# Altium PCB PCB2_relay_8k.PcbDoc
Units mil, origin at the board's own origin, x right, y up, seen from the top; angles counter-clockwise.
Board outline 5760 x 2455 mil, 2 copper layers (Top Layer, Bottom Layer); 52 components, 0 nets, 142 pads, 0 vias.
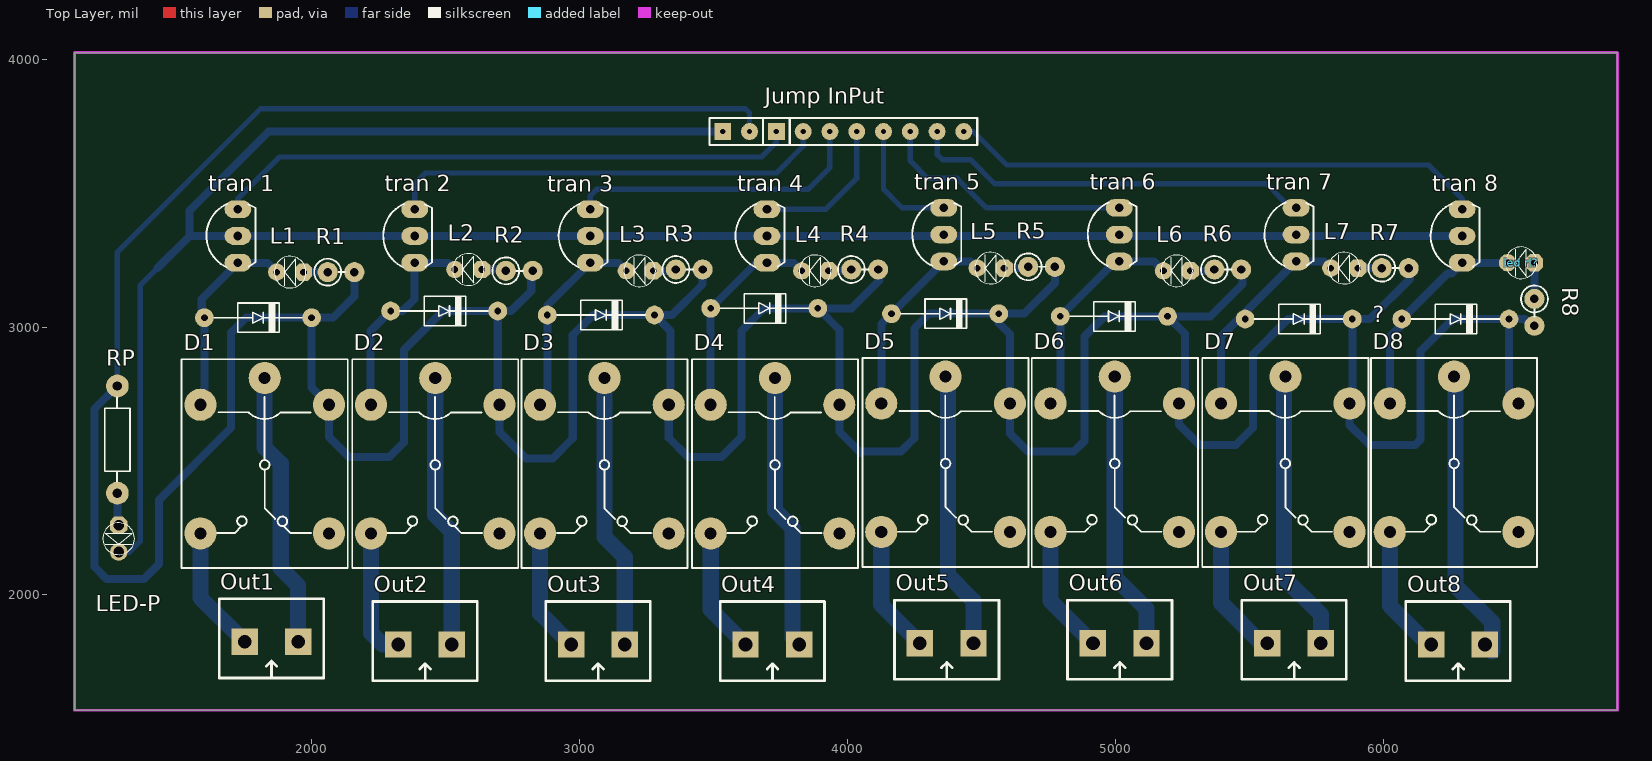
[diagram p0: Top Layer view]
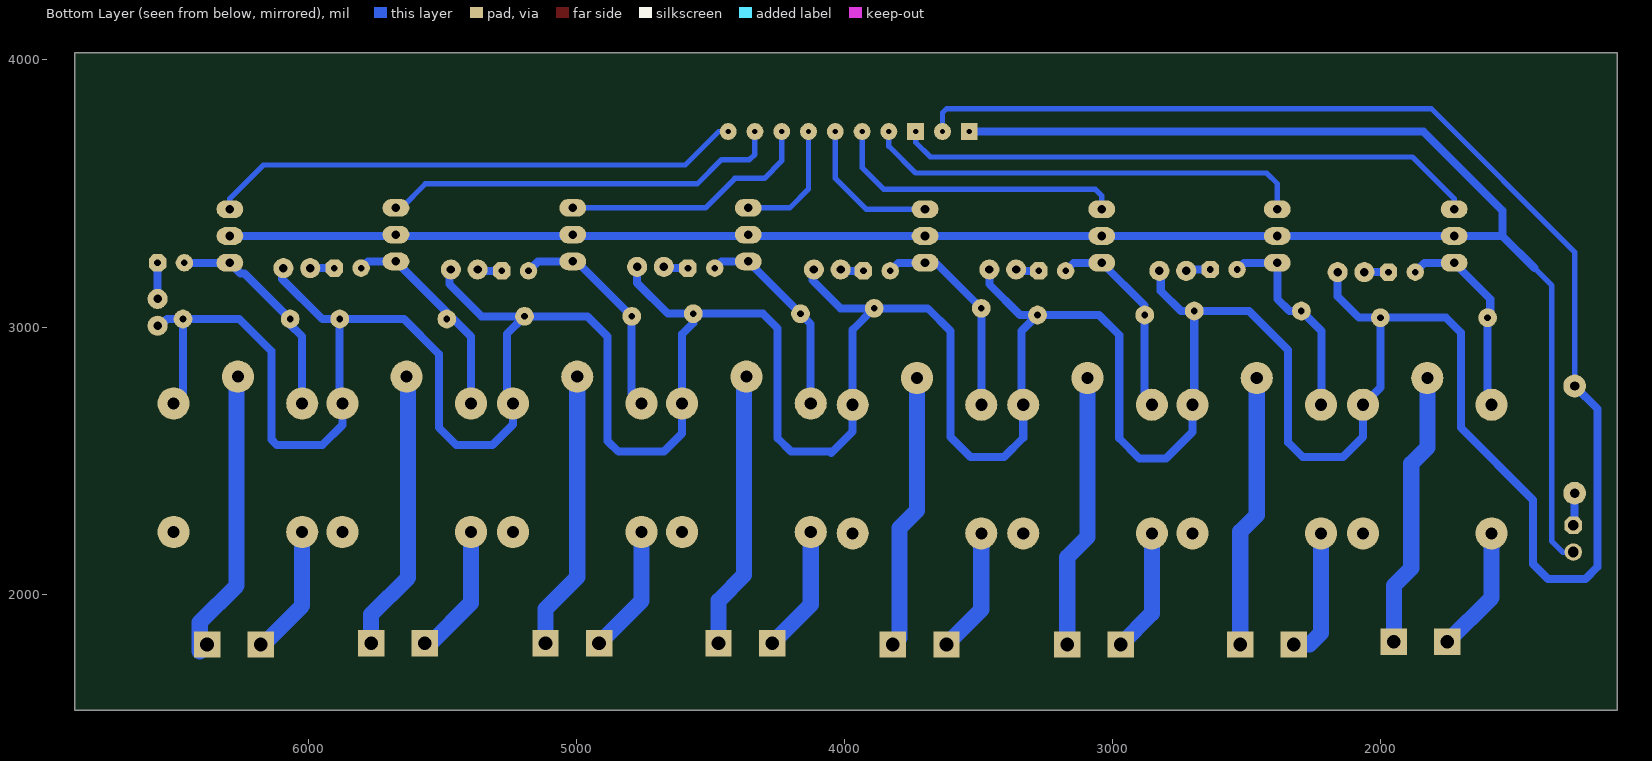
[diagram p1: Bottom Layer view, seen from below]

## Layer stack, top to bottom
Top Solder: solder mask 0.4, Solder Resist, Dk 3.5
Top Layer: signal copper 1.4
Dielectric 1: dielectric 12.6, FR-4, Dk 4.8
Bottom Layer: signal copper 1.4
Bottom Solder: solder mask 0.4, Solder Resist, Dk 3.5

## Board outline
1115,1570 6875,1570 6875,4025 1115,4025

## Design rules (kind name [scope] priority, off if disabled: settings)
Clearance [All] p1: gap=10
PolygonConnect [All] p1: connectstyle=Relief reliefconductorwidth=10 reliefentries=4 polygonreliefangle="90 Angle" airgapwidth=10
RoutingVias [All] p1: holewidth=28 width=50 viastyle="Through Hole" minholewidth=28 minwidth=50 maxholewidth=28 maxwidth=50
SolderMaskExpansion [All] p1: expansion=4
Width [All] p1: maxlimit=10 minlimit=10 preferedwidth=10
30 further rules are at their usual default settings.

## Components (designator, comment, footprint, x,y, rotation, side; value= is the part's Value field where it differs from the comment)
1n4007 "Diode" DIO-1A 1600,3035 r0 top
"1n4007 1" "Diode" DIO-1A 2295,3060 r0 top
"1n4007 2" "Diode" DIO-1A 2880,3045 r0 top
"1n4007 3" "Diode" DIO-1A 3490,3070 r0 top
"1n4007 4" "Diode" DIO-1A 4165,3050 r0 top
"1n4007 5" "Diode" DIO-1A 4795,3040 r0 top
"1n4007 6" "Diode" DIO-1A 5485,3030 r0 top
? "Diode" DIO-1A 6070,3030 r0 top
C? "JP2" JP2-D1T 3535,3730 r0 top
D1 "Relay 10A/12V" "RELAY 5" 1825,2485 r270 top (schematic designator "rl 5v")
D2 "Relay 10A/12V" "RELAY 5" 2461.67,2485 r270 top (schematic designator "rl 5v 1")
D3 "Relay 10A/12V" "RELAY 5" 3093.33,2485 r270 top (schematic designator "rl 5v 2")
D4 "Relay 10A/12V" "RELAY 5" 3730,2485 r270 top (schematic designator "rl 5v 3")
D5 "Relay 10A/12V" "RELAY 5" 4366.67,2490 r270 top (schematic designator "rl 5v 4")
D6 "Relay 10A/12V" "RELAY 5" 4998.33,2490 r270 top (schematic designator "rl 5v 5")
D7 "Relay 10A/12V" "RELAY 5" 5635,2490 r270 top (schematic designator "rl 5v 6")
D8 "Relay 10A/12V" "RELAY 5" 6265,2490 r270 top (schematic designator "role 7")
"Jump InPut" "JP8" JP8-D1T 3735,3730 r0 top (schematic designator jium1)
L1 "LED" LED-3MM-YELLOW#1 1970,3205 r180 top (schematic designator "led rl0")
L2 "LED" LED-3MM-YELLOW#1 2635,3215 r180 top (schematic designator "led rl1")
L3 "LED" LED-3MM-YELLOW#1 3275,3210 r180 top (schematic designator "led rl2")
L4 "LED" LED-3MM-YELLOW#1 3930,3210 r180 top (schematic designator "led rl3")
L5 "LED" LED-3MM-YELLOW#1 4585,3220 r180 top (schematic designator "led rl5")
L6 "LED" LED-3MM-YELLOW#1 5280,3210 r180 top (schematic designator "led rl6")
L7 "LED" LED-3MM-YELLOW#1 5905,3220 r180 top (schematic designator "led rl7")
"led rl?" "LED" LED-3MM-YELLOW#1 6565,3240 r180 top
LED-P "LED" LED-3MM-YELLOW#2 1280,2260 r270 top (schematic designator LED?)
Out1 "KF2" KF2-5.08 1850,1825 r180 top (schematic designator kf)
Out2 "KF2" KF2-5.08 2423.33,1815 r180 top (schematic designator "kf 2")
Out3 "KF2" KF2-5.08 3069.17,1815 r180 top (schematic designator "kf 3")
Out4 "KF2" KF2-5.08 3720,1815 r180 top (schematic designator "kf 4")
Out5 "KF2" KF2-5.08 4370.83,1820 r180 top (schematic designator "kf 5")
Out6 "KF2" KF2-5.08 5016.67,1820 r180 top (schematic designator "kf 6")
Out7 "KF2" KF2-5.08 5667.5,1820 r180 top (schematic designator "kf 7")
Out8 "KF2" KF2-5.08 6280,1815 r180 top (schematic designator "kf 8")
R1 "Comment" R1/4W1 2060,3205 r0 top
R2 "Comment" R1/4W1 2725,3210 r0 top
R3 "Comment" R1/4W1 3360,3215 r0 top
R4 "Comment" R1/4W1 4015,3215 r0 top
R5 "Comment" R1/4W1 4675,3225 r0 top
R6 "Comment" R1/4W1 5370,3215 r0 top
R7 "Comment" R1/4W1 5995,3220 r0 top
R8 "Comment" R1/4W1 6565,3105 r270 top
RP "220" RES-1/4W 1270,2565 r270 top (schematic designator R?)
"tran 1" "a1015" QTO-92 1725,3340 r90 top
"tran 2" "a1015" QTO-92 2385,3340 r90 top
"tran 3" "a1015" QTO-92 3040,3340 r90 top
"tran 4" "a1015" QTO-92 3700,3340 r90 top
"tran 5" "a1015" QTO-92 4360,3345 r90 top
"tran 6" "a1015" QTO-92 5015,3345 r90 top
"tran 7" "a1015" QTO-92 5675,3345 r90 top
"tran 8" "a1015" QTO-92 6295,3340 r90 top

## Footprints (in the part's own frame and the unit in brackets; to place one, negate y for a bottom-side part, rotate by r counter-clockwise, add the part's x,y. Pads: shape width x height; smd on the part's side, far side on the other; paste and mask are expansions set on the pad)
DIO-1A [mil]
  round 70 hole 25: 1(0,0) 2(400,0)
  silkscreen extent 35,-55 365,55, body extent -11,-50 411,54, height 102
JP2-D1T [mm] "2 pins, 1 row, straight, gold plating"
  rect 1.6x1.6 hole 0.508: 1(0,0)
  round 1.6 hole 0.508: 2(2.54,0)
  silkscreen extent -1.27,-1.27 3.81,1.27, body extent -1.27,-1.27 3.81,1.27, height 8.54
JP8-D1T [mm] "8 pins, 1 row, straight, gold plating"
  rect 1.6x1.6 hole 0.508: 1(0,0)
  round 1.6 hole 0.508: 2(2.54,0) 3(5.08,0) 4(7.62,0) 5(10.16,0) 6(12.7,0) 7(15.24,0) 8(17.78,0)
  silkscreen extent -1.27,-1.27 19.05,1.27, body extent -1.27,-1.27 19.05,1.27, height 8.54
KF2-5.08 [mm]
  rect 2.5x2.5 hole 1.3: 1(-2.54,0) 2(2.54,0)
  silkscreen extent -4.95,-4.08 4.95,3.43, body extent -5,-4.07 5,3.43, height 10
LED-3MM-YELLOW#1 [mil]
  oct 65x65 hole 25: 1(0,0)
  round 65 hole 25: 2(100,0)
  silkscreen extent -9,-59 109,59, body extent -27,-77 117,80, height 181
LED-3MM-YELLOW#2 [mil]
  oct 65x65 hole 40: 1(0,0)
  round 65 hole 40: 2(100,0)
  silkscreen extent -9,-59 109,59, body extent -27,-77 117,80, height 181
QTO-92 [mil] "TO-92"
  oval 66x100 hole 32: 1(-100,0) 2(0,0) 3(100,0)
  silkscreen extent -117,-65 120,118, body extent -109,-66 109,95, height 245
R1/4W1 [mm] "R 1/4W, 2 Pin, 150mil"
  round 1.905 hole 0.8: 1(0,0) 2(2.54,0)
  silkscreen extent -1.27,-1.28 1.65,1.28, body extent -0.89,-0.92 2.82,0.92, height 7.3
"RELAY 5" [mil] "Reley DPDT, 8 pin, 1A, W400mil, L800mil,H 300mil"
  round 120 hole 45: 1(-325,0) 2(255,240) 3(255,-240) 4(-225,-240) 5(-225,240)
  silkscreen extent -395,-310 385,310, body extent -371,-304 381,306, height 602
RES-1/4W [mil]
  round 85 hole 35: 1(-215,5) 2(185,5)
  silkscreen extent -173,-42 141,52, body extent -227,-42 197,52, height 95

## Part data
1n4007 "1n4007 1" "1n4007 2" "1n4007 3" "1n4007 4" "1n4007 5" "1n4007 6" ?: "Default Diode"
C? "Jump InPut": "WR-PHD 2.54 mm Angled Socket Header"
D1 D2 D3 D4 D5 D6 D7 D8: library part "Relay 5", "Relay SPDT,10A - 12VDC 5 Pin"
L1 L2 L3 L4 L5 L6 L7 "led rl?" LED-P: "LED Single colour Green and Red"
RP: library part Res, "Res"
"tran 1" "tran 2" "tran 3" "tran 4" "tran 5" "tran 6" "tran 7" "tran 8": library part A1015, "PNP 600mW, ECB"

## Nets (pads, with @x,y where several pads share a name; then routed paths per layer and width w, separated by ;. In a path a pad name is that pad's centre, name@x,y a point inside that pad or via, vN(x,y) a via of type N, cw(c..) or ccw(c..) an arc to the next point about the centre after c; other vN are vias at no path point)
pads on no net: 1n4007.1 1n4007.2 "1n4007 1.1" "1n4007 1.2" "1n4007 2.1" "1n4007 2.2" "1n4007 3.1" "1n4007 3.2" "1n4007 4.1" "1n4007 4.2" "1n4007 5.1" "1n4007 5.2" "1n4007 6.1" "1n4007 6.2" "Jump InPut.1" "Jump InPut.2" "Jump InPut.3" "Jump InPut.4" "Jump InPut.5" "Jump InPut.6" "Jump InPut.7" "Jump InPut.8" "led rl?.1" "led rl?.2" "tran 1.1" "tran 1.2" "tran 1.3" "tran 2.1" "tran 2.2" "tran 2.3" "tran 3.1" "tran 3.2" "tran 3.3" "tran 4.1" "tran 4.2" "tran 4.3" "tran 5.1" "tran 5.2" "tran 5.3" "tran 6.1" "tran 6.2" "tran 6.3" "tran 7.1" "tran 7.2" "tran 7.3" "tran 8.1" "tran 8.2" "tran 8.3" ?.1 ?.2 C?.1 C?.2 D1.1 D1.2 D1.3 D1.4 D1.5 D2.1 D2.2 D2.3 D2.4 D2.5 D3.1 D3.2 D3.3 D3.4 D3.5 D4.1 D4.2 D4.3 D4.4 D4.5 D5.1 D5.2 D5.3 D5.4 D5.5 D6.1 D6.2 D6.3 D6.4 D6.5 D7.1 D7.2 D7.3 D7.4 D7.5 D8.1 D8.2 D8.3 D8.4 D8.5 L1.1 L1.2 L2.1 L2.2 L3.1 L3.2 L4.1 L4.2 L5.1 L5.2 L6.1 L6.2 L7.1 L7.2 LED-P.1 LED-P.2 Out1.1 Out1.2 Out2.1 Out2.2 Out3.1 Out3.2 Out4.1 Out4.2 Out5.1 Out5.2 Out6.1 Out6.2 Out7.1 Out7.2 Out8.1 Out8.2 R1.1 R1.2 R2.1 R2.2 R3.1 R3.2 R4.1 R4.2 R5.1 R5.2 R6.1 R6.2 R7.1 R7.2 R8.1 R8.2 RP.1 RP.2
copper on no net: | length 56636.3
  Bottom Layer w20: 1275,2780 1275,3280 1810,3815 3620,3815 3635,3800 3635,3730 ; 1280,2160 1320,2160 1360,2200 1360,3155 1425,3220 ; 1725,3440 1725,3480 1880,3635 3680,3635 3735,3690 3735,3730 ; 2385,3440 2385,3535 2425,3575 3735,3575 3835,3675 3835,3730 ; 3040,3440 3040,3490 3065,3515 3855,3515 3935,3595 3935,3730 ; 3700,3440 3920,3440 4035,3555 4035,3730 ; 4135,3730 4135,3515 4205,3445 4360,3445 ; 4235,3730 4235,3620 4300,3555 4410,3555 4520,3445 5015,3445 ; 4335,3730 4335,3645 4355,3625 4460,3625 4550,3535 5565,3535 5655,3445 5675,3445 ; 4435,3730 4470,3730 4595,3605 6170,3605 6295,3480 6295,3440
  Bottom Layer w30: 1275,2380 1275,2265 1280,2260 ; 1275,2780 1190,2695 1190,2105 1235,2060 1375,2060 1430,2115 1430,2355 1700,2625 1700,2980 1755,3035 2000,3035 ; 1425,3220 1545,3340 ; 1585,2710 1600,2725 1600,3035 1590,3045 1590,3105 1725,3240 1835,3240 1870,3205 ; 1970,3205 2055,3205 ; 2145,3205 2160,3190 2160,3115 2080,3035 2000,3035 ; 2221.67,2710 2220,2711.67 2220,2985 2295,3060 2340,3060 2385,3105 2385,3240 2510,3240 2535,3215 ; 2635,3215 2730,3215 ; 2820,3215 2820,3135 2745,3060 2695,3060 ; 2853.33,2710 2880,2736.67 2880,3045 2880,3080 3040,3240 3145,3240 3175,3210 ; 3275,3210 3360,3210 ; 3450,3210 3460,3200 3460,3160 3345,3045 3280,3045 ; 3490,2710 3490,3070 3660,3240 3700,3240 3800,3240 3830,3210 ; 3535,3730 1840,3730 1545,3435 1545,3340 ; 3930,3210 4010,3210 ; 4120,3190 4120,3175 4015,3070 3890,3070 ; 4126.67,2715 4126.67,3011.67 4165,3050 4360,3245 4460,3245 4485,3220 ; 4585,3220 4670,3220 ; 4758.33,2715 4795,2751.67 4795,3040 5000,3245 5015,3245 5145,3245 5180,3210 ; 4760,3220 4775,3205 4775,3165 4660,3050 4565,3050 ; 5280,3210 5365,3210 ; 5395,2715 5395,2965 5460,3030 5485,3030 5485,3055 5675,3245 5780,3245 5805,3220 ; 5460,3215 5475,3200 5475,3160 5355,3040 5195,3040 ; 5905,3220 6005,3220 6010,3215 ; 6025,2715 6025,2965 6070,3010 6070,3030 6240,3200 6255,3200 6295,3240 6465,3240 ; 6100,3215 6100,3180 5950,3030 5885,3030 ; 6295,3340 3700,3340 3040,3340 2385,3340 1725,3340 1545,3340 ; 6505,2715 6470,2750 6470,3030 ; 6565,3240 6565,3125 6570,3120 ; 6570,3010 6550,3010 6530,3030 6470,3030 ; 2000,3035 2000,2775 2065,2710 2065,2590 2140,2515 2290,2515 2345,2570 2345,2915 2490,3060 2695,3060 ; 2695,3060 2695,2716.67 2701.67,2710 2701.67,2608.33 2800,2510 2900,2510 2975,2585 2975,2970 3050,3045 3280,3045 ; 3280,3045 3340,2985 3340,2716.67 3333.33,2710 3333.33,2586.67 3405,2515 3530,2515 3605,2590 3605,2985 3690,3070 3890,3070 ; 3890,3070 3970,2990 3970,2710 3970,2610 4050,2530 4055,2535 4200,2535 4250,2585 4250,2995 4305,3050 4565,3050 ; 4565,3050 4565,3015 4606.67,2973.33 4606.67,2715 4606.67,2603.33 4675,2535 4845,2535 4885,2575 4885,2965 4960,3040 5195,3040 ; 5195,3040 5260,2975 5260,2736.67 5238.33,2715 5238.33,2636.67 5315,2560 5450,2560 5515,2625 5515,2900 5645,3030 5885,3030 ; 5885,3030 5885,2725 5875,2715 5875,2635 5950,2560 6120,2560 6140,2580 6140,2910 6260,3030 6470,3030
  Bottom Layer w60: 1585,2230 1585,1990 1750,1825 ; 1825,2810 1825,2550 1885,2490 1885,2100 1950,2035 1950,1825 ; 2221.67,2230 2221.67,1858.33 2265,1815 2323.33,1815 ; 2461.67,2810 2461.67,2298.33 2523.33,2236.67 2523.33,1815 ; 2853.33,2230 2853.33,1930.83 2969.17,1815 ; 3093.33,2810 3093.33,2216.67 3169.17,2140.83 3169.17,1815 ; 3490,2230 3490,1945 3620,1815 ; 3730,2810 3730,2315 3795,2250 3795,1840 3820,1815 ; 4126.67,2235 4126.67,1964.17 4270.83,1820 ; 4366.67,2815 4375,2806.67 4375,2075 4470.83,1979.17 4470.83,1820 ; 4758.33,2235 4758.33,1978.33 4916.67,1820 ; 4998.33,2815 4998.33,2066.67 5116.67,1948.33 5116.67,1820 ; 5395,2235 5395,1970 5545,1820 5567.5,1820 ; 5635,2815 5630,2810 5630,2065 5767.5,1927.5 5767.5,1820 ; 6025,2225 6025,1960 6175,1810 6197.5,1810 ; 6275,2785 6270,2780 6270,2035 6407.5,1897.5 6407.5,1790

## Keep-outs
Top Layer:
  the board outline again, w10